# Altium PCB pcb_layout.PcbDoc
Units mil, origin at the board's own origin, x right, y up, seen from the top; angles counter-clockwise.
Board outline 2210.03 x 2460.03 mil, 2 copper layers (Top Layer, Bottom Layer); 17 components, 13 nets, 80 pads, 0 vias.
Unrouted connection lines stored in the file: 3.
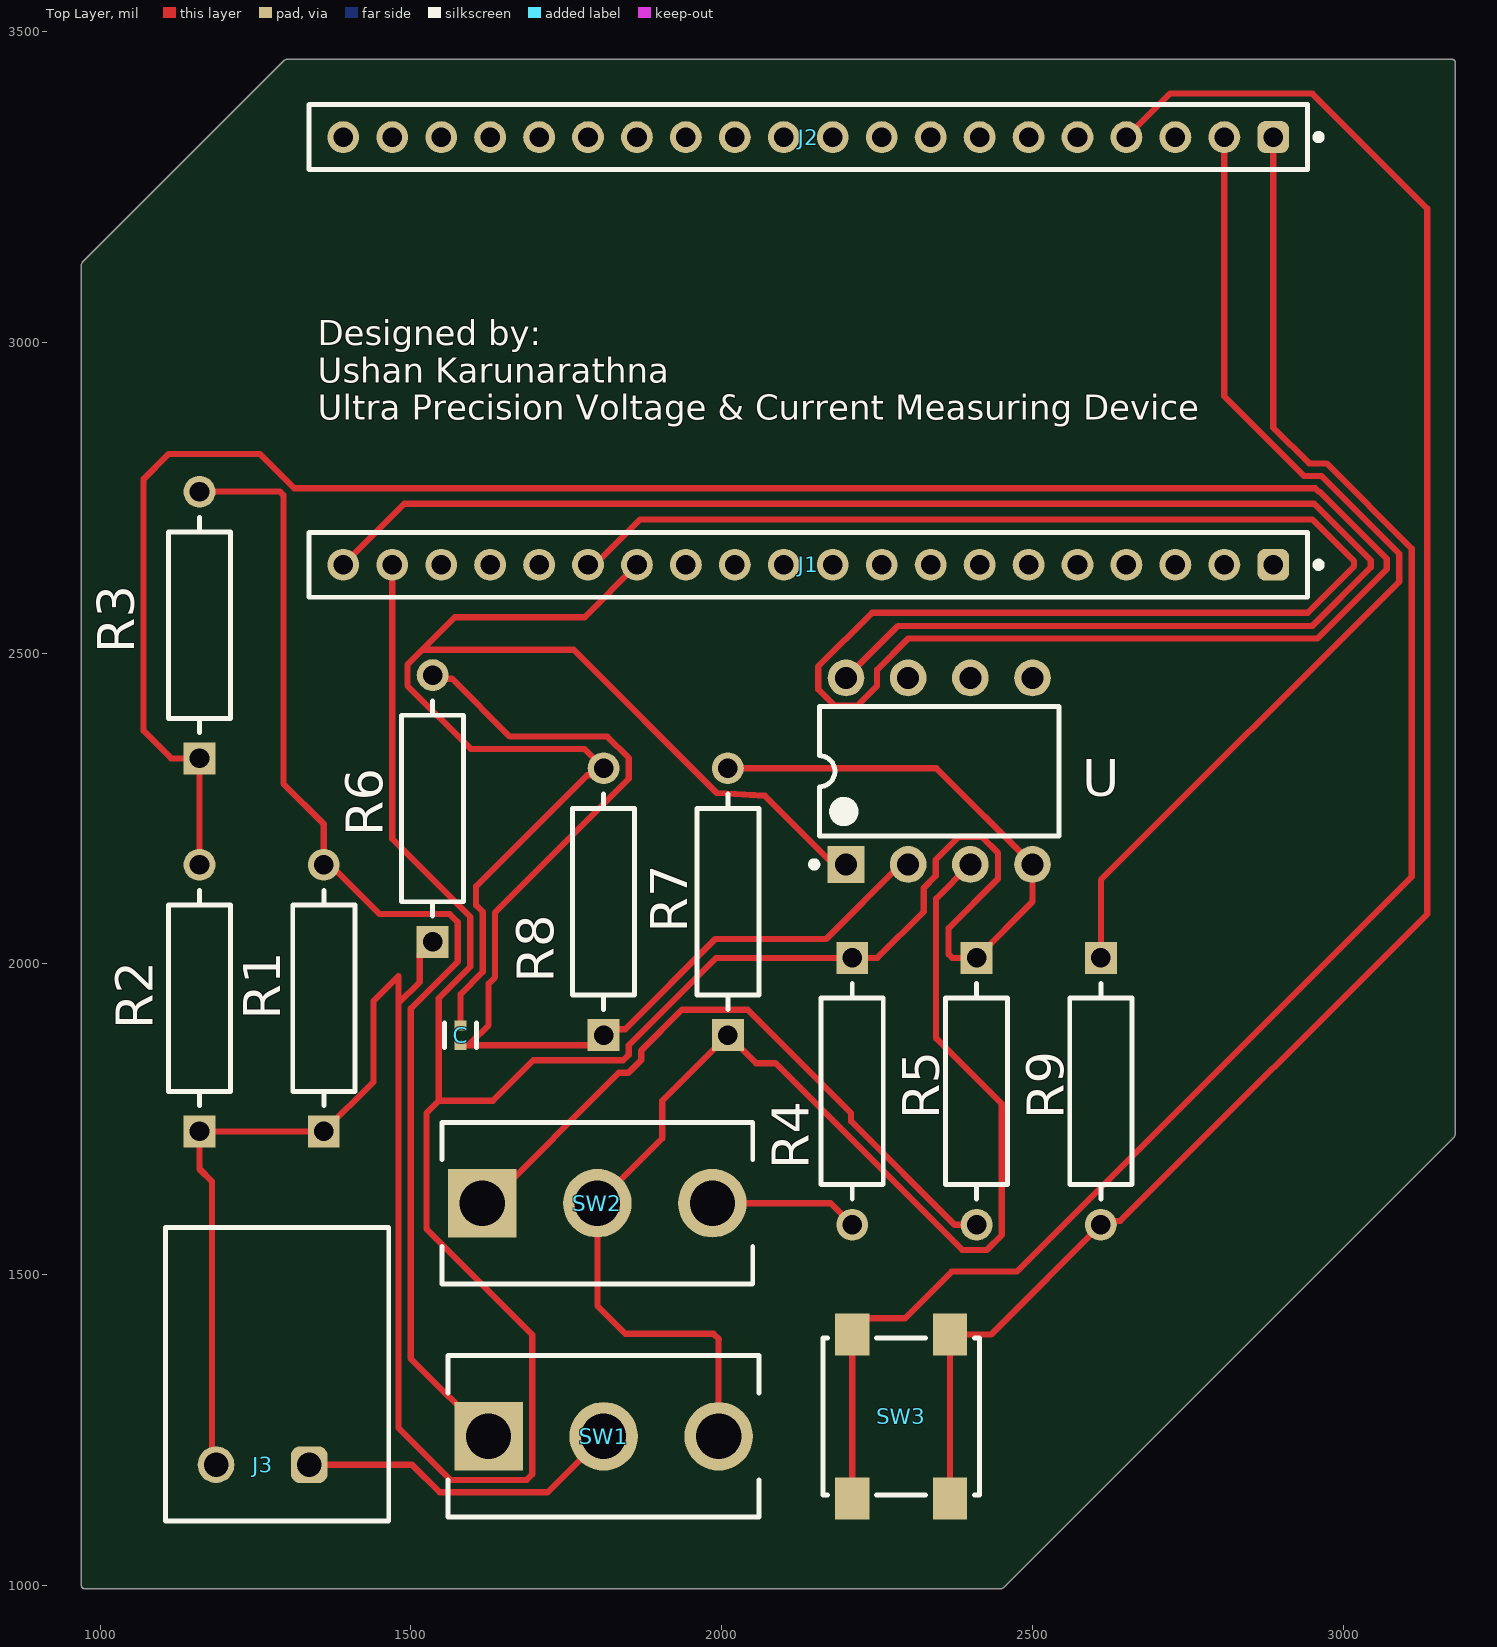
[diagram p0: Top Layer view]
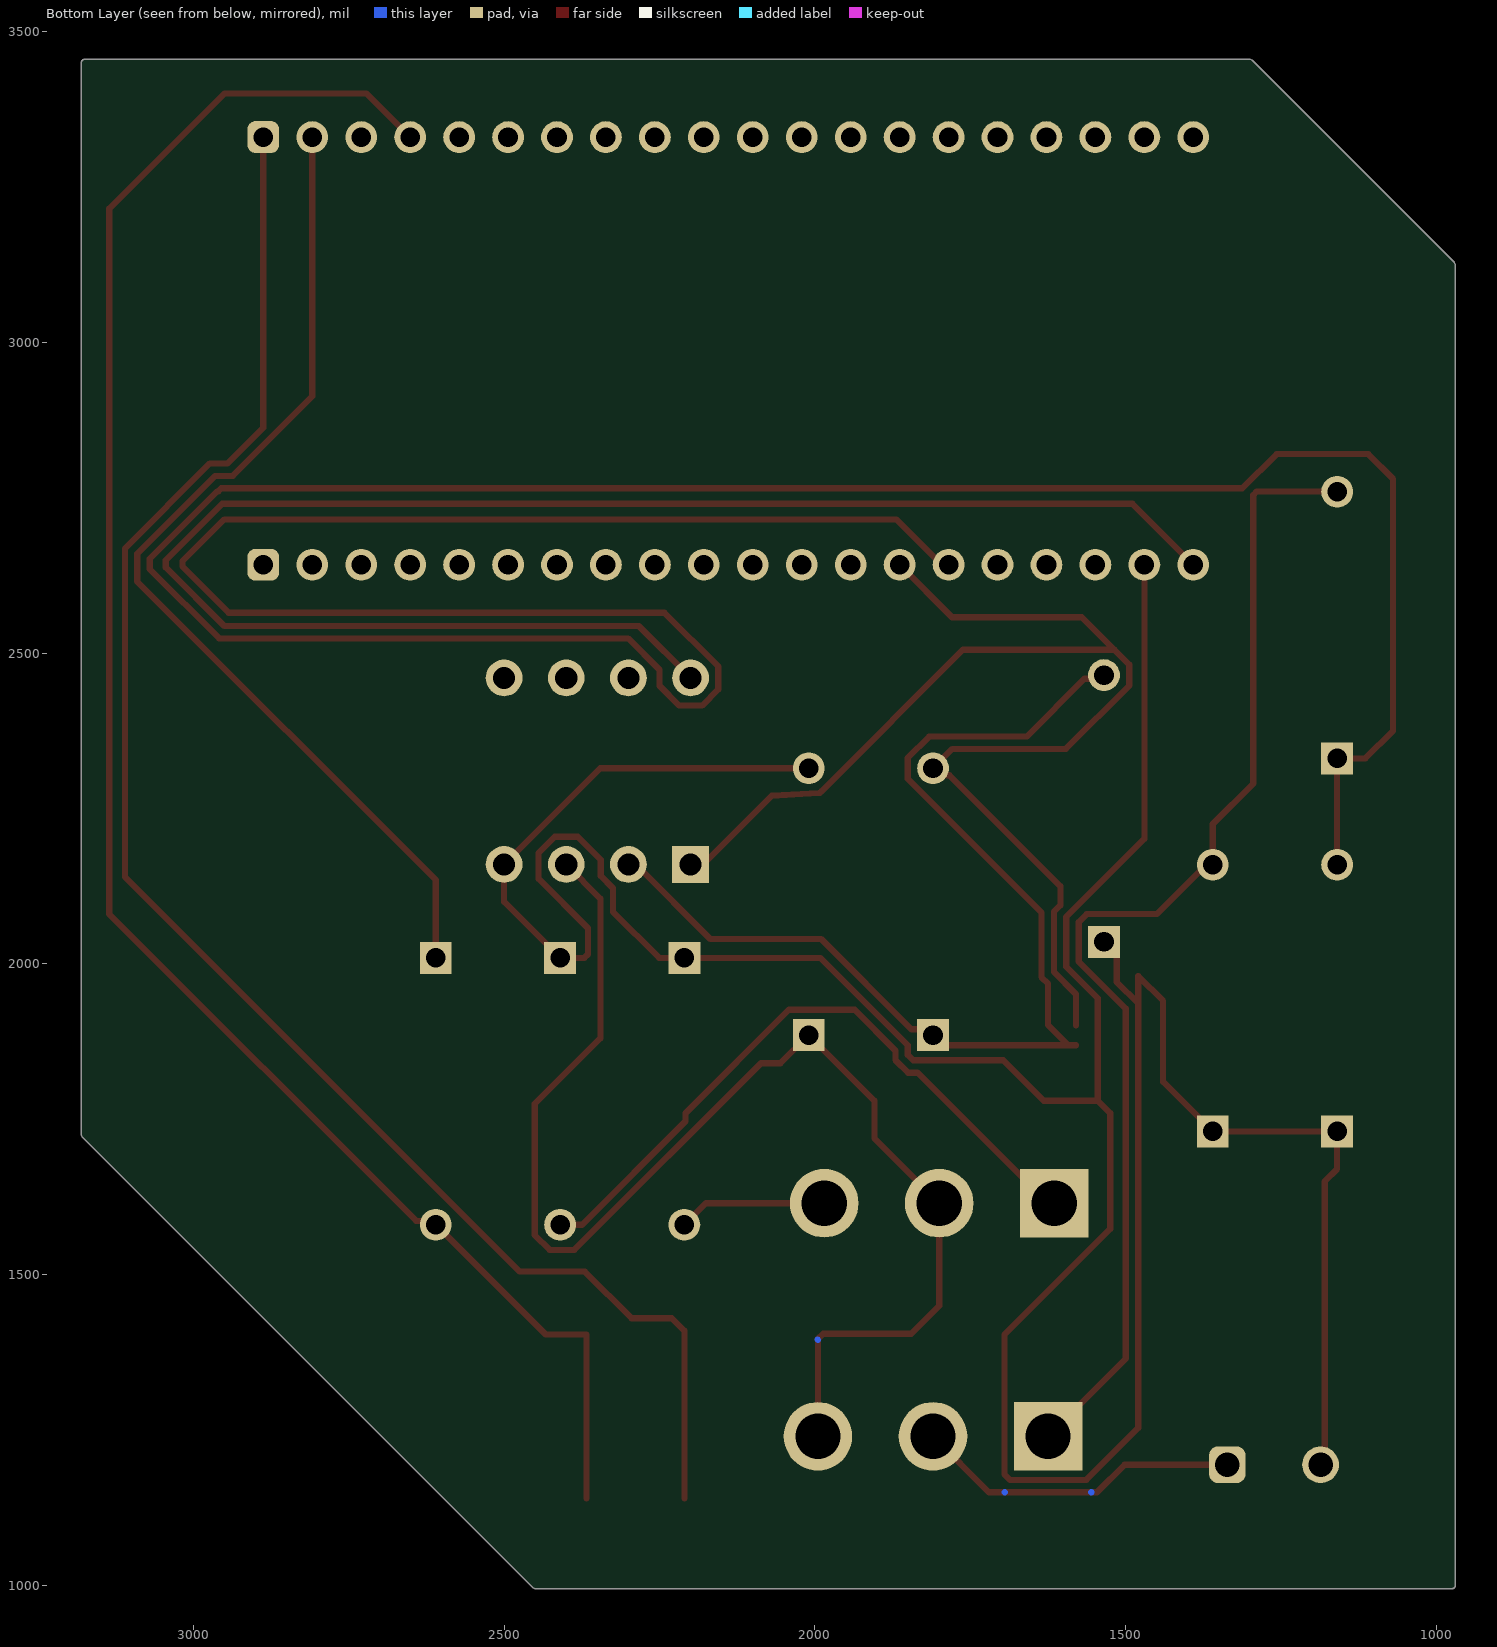
[diagram p1: Bottom Layer view, seen from below]
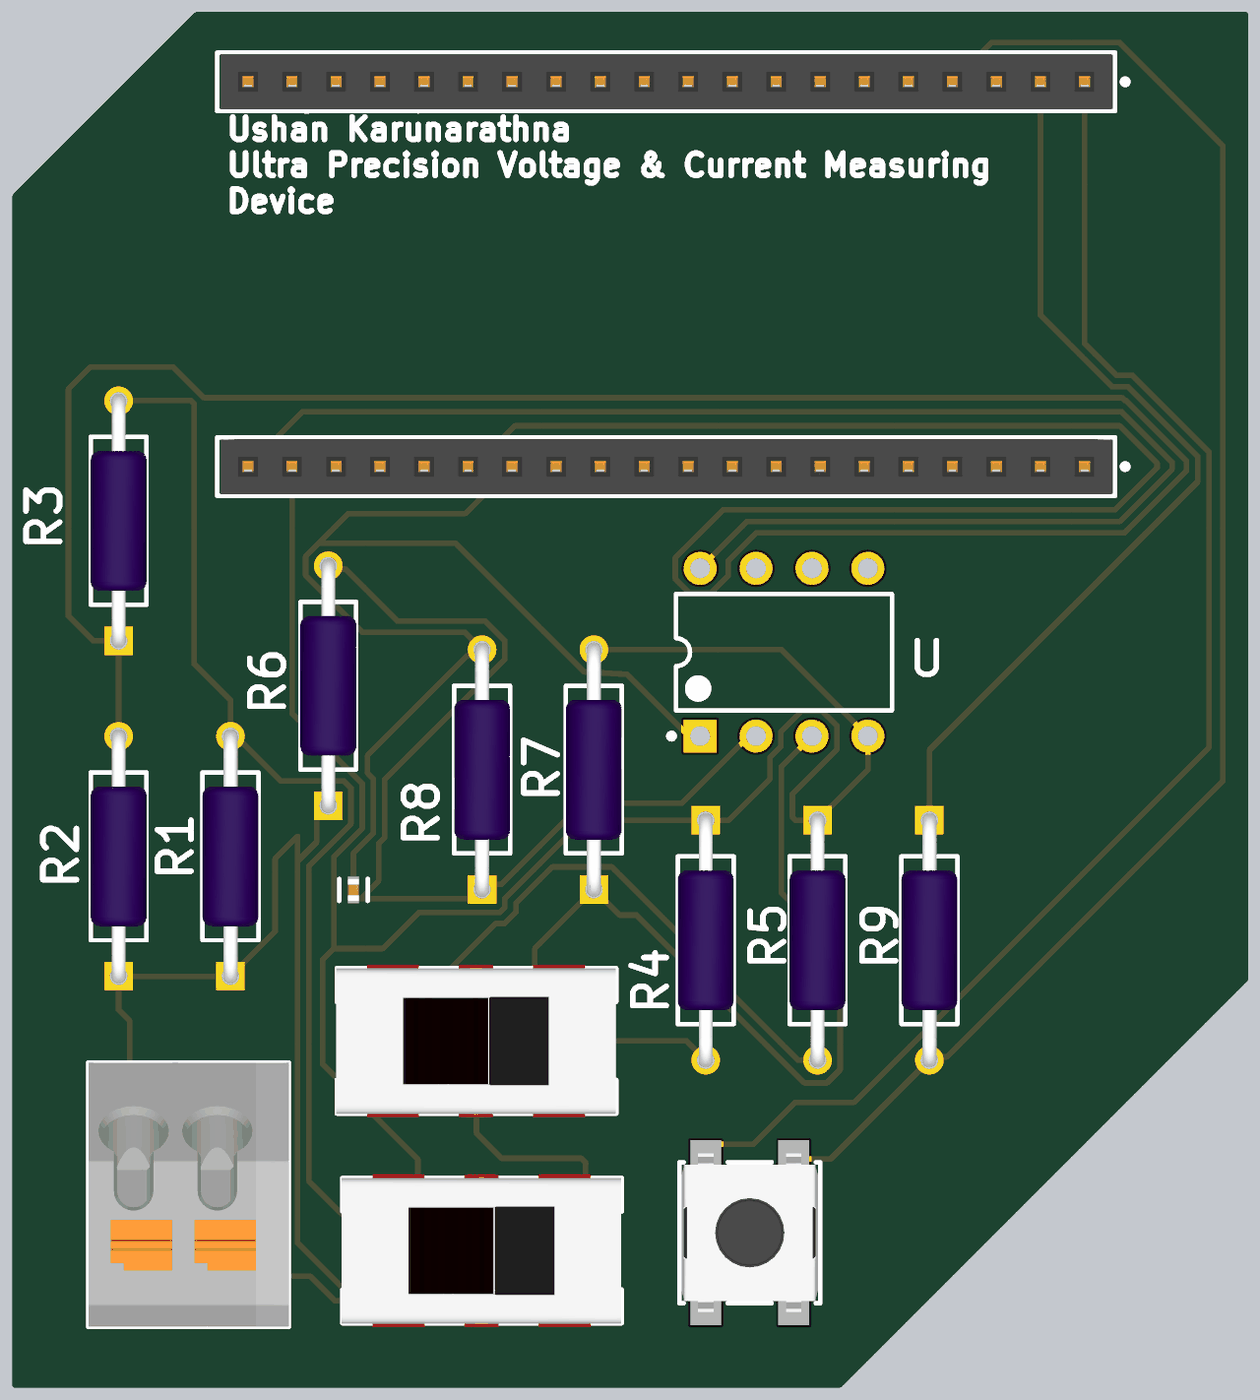
[diagram p2: 3D render of the assembled board from above, using the file's embedded part models]

## Layer stack, top to bottom
Top Solder: solder mask 0.4, Solder Resist, Dk 3.5
Top Layer: signal copper 1.4
Dielectric 1: dielectric 12.6, FR-4, Dk 4.8
Bottom Layer: signal copper 1.4
Bottom Solder: solder mask 0.4, Solder Resist, Dk 3.5

## Board outline
969.99,1000 969.99,2825 969.99,3125 971.45,3128.55 1296.45,3453.55 1300,3455.01 3175,3455.01 cw(c3175,3450) 3180.01,3450 3180.01,1725 3178.55,1721.45 2453.55,996.45 2450,994.99 975,994.99 cw(c975,1000)

## Design rules (kind name [scope] priority, off if disabled: settings)
Clearance [All] p1: gap=10 ignorepadtopadclearanceinfootprint=TRUE
PolygonConnect [All] p1: connectstyle=Relief reliefconductorwidth=10 reliefentries=4 polygonreliefangle="90 Angle" airgapwidth=10
RoutingVias [All] p1: holewidth=28 width=50 viastyle="Through Hole" minholewidth=28 minwidth=50 maxholewidth=28 maxwidth=50
SolderMaskExpansion [All] p1: expansion=4 istentingtop=FALSE
Width [All] p1: maxlimit=10 minlimit=10 preferedwidth=10
30 further rules are at their usual default settings.

## Components (designator, comment, footprint, x,y, rotation, side; value= is the part's Value field where it differs from the comment)
C "220nF" FP-GRM155-0_05-MFG 1580,1885 r90 top
J1 "Vertical Socket Header" 62002011821 2139.33,2642 r180 top
J2 "62002011821" 62002011821 2139.33,3330 r180 top
J3 "Screw Terminal Block" 691417320002S 1285,1340 r180 top
R1 "220" FP-PTF56-MFG 1360,1945 r90 top
R2 "1M" FP-PTF56-MFG 1160,1945 r90 top
R3 "4.7M" FP-PTF56-MFG 1160,2545 r90 top
R4 "33" FP-PTF56-MFG 2210,1795 r270 top
R5 "0.22" FP-PTF56-MFG 2410,1795 r270 top
R6 "1.2k" FP-PTF56-MFG 1535,2250 r90 top
R7 "100k" FP-PTF56-MFG 2010,2100 r90 top
R8 "100k" FP-PTF56-MFG 1810,2100 r90 top
R9 "100k" FP-PTF56-MFG 2610,1795 r270 top
SW1 "Miniature Slide Switch" FP-1101M2S3CGE2-MFG 1810.04,1240 r90 top
SW2 "Miniature Slide Switch" FP-1101M2S3CGE2-MFG 1800.04,1615 r90 top
SW3 "Push Button" 430473035826 2288.74,1271.89 r90 top
U "MCP6002-I/P" PDIP300-P8 2350,2310 r90 top (schematic designator U2)

## Footprints (in the part's own frame and the unit in brackets; to place one, negate y for a bottom-side part, rotate by r counter-clockwise, add the part's x,y. Pads: shape width x height; smd on the part's side, far side on the other; paste and mask are expansions set on the pad)
62002011821 [mm] "Socket Header, Pitch 2.00 mm, THT, Vertical, single row, 20p"
  rrect50% 1.3x1.3 hole 0.8: 1(-19,0)
  round 1.3 hole 0.8: 2(-17,0) 3(-15,0) 4(-13,0) 5(-11,0) 6(-9,0) 7(-7,0) 8(-5,0) 9(-3,0) 10(-1,0) 11(1,0) 12(3,0) 13(5,0) 14(7,0) 15(9,0) 16(11,0) 17(13,0) 18(15,0) 19(17,0) 20(19,0)
  silkscreen extent -20.98,-1.33 20.4,1.33, body extent -20.25,-1.25 20.25,1.25, height 4.35
430473035826 [mm] "SMD Tact Switch, body 6x6mm"
  rect 1.7x1.4 smd: A1(-3.35,2) A2(3.35,2) B1(-3.35,-2) B2(3.35,-2)
  silkscreen extent -3.2,-3.2 3.2,3.2, body extent -3.6,-3.1 3.6,3.1, height 3.5
691417320002S [mm] "Serie 4713S-3.81mm 45¡ã Cable Entry Screwless, 2 pins"
  rrect50% 1.5x1.5 hole 1: 1(-1.31,3.7)
  round 1.5 hole 1: 2(2.5,3.7)
  silkscreen extent -4.56,-6 4.56,6, body extent -4.56,-6 4.54,6, height 13.28
FP-1101M2S3CGE2-MFG [mm]
  rect 2.8x2.8 hole 1.85 paste-2539.97 mask+0: 1(0,4.7)
  round 2.8 hole 1.85 paste-2539.97 mask+0: 2(0,0) 3(0,-4.7)
  silkscreen extent -3.3,-6.35 3.3,6.35, body extent -3.4,-6.45 3.4,6.45, height 0.25
FP-GRM155-0_05-MFG [mm]
  rect 0.4x0.5 smd paste+0 mask+0: 1(-0.4,0) 2(0.4,0)
  silkscreen extent -0.5,-0.65 0.5,0.65, body extent -0.7,-0.38 0.7,0.38, height 0.25
FP-PTF56-MFG [mm]
  rect 1.3x1.3 hole 0.8 paste-2539.97 mask+0: 1(-5.45,0)
  round 1.3 hole 0.8 paste-2539.97 mask+0: 2(5.45,0)
  silkscreen extent -4.4,-1.27 4.4,1.27, body extent -6.2,-1.37 6.2,1.37, height 0.25
PDIP300-P8 [mm] "8-Pin Plastic Dual In-Line Package (PDIP)"
  rect 1.5x1.5 hole 0.9: 1(-3.81,3.81)
  round 1.5 hole 0.9: 2(-3.81,1.27) 3(-3.81,-1.27) 4(-3.81,-3.81) 5(3.81,-3.81) 6(3.81,-1.27) 7(3.81,1.27) 8(3.81,3.81)
  silkscreen extent -3.93,-4.9 2.65,5.23, body extent -3.55,-4.9 3.55,4.9, height 4.32

## Part data
C: library part CMP-06035-063955-1, "Multilayer Ceramic Capacitor 0.22uF 10% 63V X5R 0402 Paper T/R"
J1 J2: library part CMP-1502-01214-3, Contact Resistance=20mΩ, Current Rating=2A, Operating Supply Voltage=250V, Gender=Female, Lead Pitch=2mm, NexarPartId=65162172, Number of Pins=20, Orientation=Vertical
J3: library part CMP-1502-02970-2, NexarPartId=105951391
R1: library part CMP-00030-29520625-1, "Res Metal Film 220 Ohm 1% ± 5ppm/°C 1/8W Axial Leaded T/R", Case/Package=Axial, Max Operating Temperature=150°C, Min Operating Temperature=-55°C, Power Rating=125mW, Resistance=250kΩ, Temperature Coefficient=5ppm/°C, Tolerance=1%, Voltage Rating=300V, Composition="Metal Film", Height=2.54mm, Lead Diameter=640µm, Length=6.35mm, Mount="Through Hole", NexarPartId=29520625, RoHS=Compliant, Termination=Axial, Weight=350.003213mg
R2: library part CMP-00030-29520625-1, "Res Metal Film 1MOhm 1% ± 5ppm/°C 1/8W Axial Leaded T/R", Case/Package=Axial, Max Operating Temperature=150°C, Min Operating Temperature=-55°C, Power Rating=125mW, Resistance=250kΩ, Temperature Coefficient=5ppm/°C, Tolerance=1%, Voltage Rating=300V, Composition="Metal Film", Height=2.54mm, Lead Diameter=640µm, Length=6.35mm, Mount="Through Hole", NexarPartId=29520625, RoHS=Compliant, Termination=Axial, Weight=350.003213mg
R3: library part CMP-00030-29520625-1, "Res Metal Film 4.7MOhm 1% ± 5ppm/°C 1/8W Axial Leaded T/R", Case/Package=Axial, Max Operating Temperature=150°C, Min Operating Temperature=-55°C, Power Rating=125mW, Resistance=250kΩ, Temperature Coefficient=5ppm/°C, Tolerance=1%, Voltage Rating=300V, Composition="Metal Film", Height=2.54mm, Lead Diameter=640µm, Length=6.35mm, Mount="Through Hole", NexarPartId=29520625, RoHS=Compliant, Termination=Axial, Weight=350.003213mg
R4: library part CMP-00030-29520625-1, "Res Metal Film 33Ohm 1% ± 5ppm/°C 1/8W Axial Leaded T/R", Case/Package=Axial, Max Operating Temperature=150°C, Min Operating Temperature=-55°C, Power Rating=125mW, Resistance=250kΩ, Temperature Coefficient=5ppm/°C, Tolerance=1%, Voltage Rating=300V, Composition="Metal Film", Height=2.54mm, Lead Diameter=640µm, Length=6.35mm, Mount="Through Hole", NexarPartId=29520625, RoHS=Compliant, Termination=Axial, Weight=350.003213mg
R5: library part CMP-00030-29520625-1, "Res Metal Film 0.22Ohm 1% ± 5ppm/°C 1/8W Axial Leaded T/R", Case/Package=Axial, Max Operating Temperature=150°C, Min Operating Temperature=-55°C, Power Rating=125mW, Resistance=250kΩ, Temperature Coefficient=5ppm/°C, Tolerance=1%, Voltage Rating=300V, Composition="Metal Film", Height=2.54mm, Lead Diameter=640µm, Length=6.35mm, Mount="Through Hole", NexarPartId=29520625, RoHS=Compliant, Termination=Axial, Weight=350.003213mg
R6: library part CMP-00030-29520625-1, "Res Metal Film 1.2kOhm 1% ± 5ppm/°C 1/8W Axial Leaded T/R", Case/Package=Axial, Max Operating Temperature=150°C, Min Operating Temperature=-55°C, Power Rating=125mW, Resistance=250kΩ, Temperature Coefficient=5ppm/°C, Tolerance=1%, Voltage Rating=300V, Composition="Metal Film", Height=2.54mm, Lead Diameter=640µm, Length=6.35mm, Mount="Through Hole", NexarPartId=29520625, RoHS=Compliant, Termination=Axial, Weight=350.003213mg
R7 R8: library part CMP-00030-29520625-1, "Res Metal Film 100kOhm 1% ± 5ppm/°C 1/8W Axial Leaded T/R", Case/Package=Axial, Max Operating Temperature=150°C, Min Operating Temperature=-55°C, Power Rating=125mW, Resistance=250kΩ, Temperature Coefficient=5ppm/°C, Tolerance=1%, Voltage Rating=300V, Composition="Metal Film", Height=2.54mm, Lead Diameter=640µm, Length=6.35mm, Mount="Through Hole", NexarPartId=29520625, RoHS=Compliant, Termination=Axial, Weight=350.003213mg
R9: library part CMP-00030-29520625-1, "PTF56250K00FZEB Res Metal Film 250kOhm 1% ± 5ppm/°C 1/8W Axial Leaded T/R", Case/Package=Axial, Max Operating Temperature=150°C, Min Operating Temperature=-55°C, Power Rating=125mW, Resistance=250kΩ, Temperature Coefficient=5ppm/°C, Tolerance=1%, Voltage Rating=300V, Composition="Metal Film", Height=2.54mm, Lead Diameter=640µm, Length=6.35mm, Mount="Through Hole", NexarPartId=29520625, RoHS=Compliant, Termination=Axial, Weight=350.003213mg
SW1 SW2: library part CMP-10038-000004-1, "SWITCH SLIDE SPDT 6A 120V", Contact Current Rating=6A, Contact Resistance=10mΩ, Manufacturer="C&K Components", Manufacturer Part Number=1101M2S3CGE2, Temperature="-30°C to +65°C", Temperature Range High=+65°C, Temperature Range Low=-30°C, Voltage Rating Ac=120V, Voltage Rating Dc=28V, Automotive=No, Category=Switch, ComponentLink2Description=Datasheet, ComponentLink2URL=https://www.ckswitches.com/media/1429/1000.pdf, Device Class L1=Electromechanical, Device Class L2=Switches, Device Class L3="Slide Switches", Digikey Description="SWITCH SLIDE SPDT 6A 120V", Electromechanical Life=40000Cycles, Height=13.34mm, Lead Free=Yes, Mount="Through Hole", Mouser Description="Switch Slide ON None ON SPDT Top Slide 6A 250VAC 28VDC 0.4VA PC Pins Thru-Hole Bulk", Octopart=https://octopart.com/1101m2s3cge2-c%26k+components-2817222, Package=1101M2S3CGE2, RoHS=TRUE, Throw Configuration=SPDT
SW3: library part CMP-1455-00006-3, "Switch Tactile Spst-no 0.05A 12V", Current Rating=50mA, Insulation Resistance=100MΩ, Max Operating Temperature=85°C, Min Operating Temperature=-40°C, Voltage Rating=12V, Actuator Material="Liquid Crystal Polymer, Polymer", Contact Plating=Silver, Height=3.5mm, Illumination Type=Non-Illuminated, Mechanical Life=500kcycles, Mount="Surface Mount", Packaging="Tape and Reel", RoHS=Compliant, Switch Function=Off-Mom, Switch Travel=250µm, Throw Configuration=SPST
U: library part CMP-0187-00119-3, "None", Case/Package=PDIP, Input Bias Current=1pA, Input Offset Voltage (Vos)=4.5mV, Max Frequency=1kHz, Max Input Voltage=6V, Max Operating Temperature=85°C, Min Input Voltage=1.8V, Min Operating Temperature=-40°C, Nominal Supply Current=100uA, Operating Supply Voltage=5.5V, Output Current=23mA, Package Quantity=60, Power Supply Rejection Ratio (PSRR)=86dB, Voltage Gain=112dB, Amplifier Type="GENERAL PURPOSE", Bandwidth=1MHz, Common Mode Rejection Ratio=60dB, Gain Bandwidth Product=1MHz, Height=0.195inch, Input Offset Voltage-Max=4.5mV, Lead Free="Lead Free", Length=0.4inch, Max Supply Voltage=6V, Min Supply Voltage=1.8V, Mount="Through Hole", Number of Amplifiers=2, Number of Channels=2, Number of Circuits=2, Number of Elements=2, Number of Pins=8, Operating Supply Current=100uA, Output Current per Channel=23mA, Packaging=Rail/Tube, Radiation Hardening=No, REACH SVHC="No SVHC", RoHS Compliant=Yes, Slew Rate=0.6V/µs, Slew Rate-Nom=0.6V/µs, Supply Current=100uA, Technology=CMOS, Unity Gain Bandwidth Product=1MHz, Width=0.28inch

## Nets (pads, with @x,y where several pads share a name; then routed paths per layer and width w, separated by ;. In a path a pad name is that pad's centre, name@x,y a point inside that pad or via, vN(x,y) a via of type N, cw(c..) or ccw(c..) an arc to the next point about the centre after c; other vN are vias at no path point)
NetC_1: C.1 R6.2 R8.1 U.2 | length 1776.1
  Top Layer w10: R6.2 1540.99,2458.58 1566.42,2458.58 1659.31,2365.69 1816.28,2365.69 1850.59,2331.38 1850.59,2297.75 1635.59,2082.75 1635.59,1978.78 1625,1968.19 1625,1901.53 1595.6,1872.13 ; C.1 1595.6,1869.25 1793.82,1869.25 1819.3,1894.73 1844.73,1894.73 1990,2040 2168.04,2040 2288.04,2160 U.2
NetC_2: C.2 J1.14 R8.2 U.1 | length 2188.7
  Top Layer w10: C.2 1580,1951.47 1615.59,1987.06 1615.59,2083.81 1605,2094.4 1605,2125 1783.58,2303.58 1787.87,2303.58 1798.86,2314.57 R8.2 1778.88,2345.69 1596.47,2345.69 1494.41,2447.75 1494.41,2481.38 1518.19,2505.16 ; J1.14 1779.49,2557.75 1570.78,2557.75 1518.19,2505.16 ; U.1 2175.47,2164.53 2069.54,2270.46 2007.65,2274.04 cw(c2010,2314.57) 2007.5,2274.05 1992.16,2275 1989.23,2277.93 1762.01,2505.16 1518.19,2505.16
NetJ1_15: J1.15 R2.2 R3.1 | length 6083
  Top Layer w10: R2.2 R3.1 1114.57,2330.43 1070,2375 1070,2780 1110,2820 1257.43,2820 1312.43,2765 2955,2765 2960,2760 2961.57,2760 3070,2651.57 3070,2635 2958.54,2523.54 2300.57,2523.54 2250,2472.97 2250,2447.03 2218.44,2415.47 2181.56,2415.47 2155.47,2441.56 2155.47,2478.44 2242.03,2565 2943.12,2565 3017.42,2639.3 3017.42,2647.58 2950,2715 1869.14,2715 1796.14,2642 J1.15
NetJ1_19: J1.19 J3.2 R1.1 R2.1 R4.1 R5.1 R6.1 R7.2 U.4 | length 5882
  Top Layer w10: J3.2@1180,1200.91 1180,1650 1160,1670 R2.1 R1.1 1440,1810.43 1440,1940.43 1480,1980.43 1480,1936.32 ; J1.19 1470.04,2201.07 1595.59,2075.52 1595.59,1995.35 1544.88,1944.64 1544.88,1779.88 ; R6.1 1514.41,2014.84 1514.41,1970.73 1480,1936.32 ; R7.2 2345.43,2314.57 U.4 2500,2099.57 R5.1 2370.86,2009.57 2365,2015.42 2365,2057.17 2444.53,2136.7 2444.53,2178.44 2418.44,2204.53 2381.56,2204.53 2344.53,2167.5 2344.53,2141.56 2325,2122.03 2325,2083.98 2250.59,2009.57 R4.1 1991.24,2009.57 1850.59,1868.91 1850.59,1853.63 1841.8,1844.84 1697.02,1844.84 1632.05,1779.88 1544.88,1779.88 ; 1480,1936.32 1480,1253.55 1563.67,1169.88 1686.33,1169.88 1695.12,1178.67 1695.12,1403.43 1525,1573.55 1525,1760 1544.88,1779.88
  Bottom Layer w10: J3.2@1180,1200.91 J3.2
NetJ1_20: J1.20 U.8 | length 2660.2
  Top Layer w10: J1.20 1489.3,2740 2953.28,2740 3044.14,2649.14 3044.14,2637.74 2949.94,2543.54 2283.54,2543.54 U.8
NetJ2_1: J2.1 SW3.A1 SW3.A2 | length 2771
  Top Layer w10: SW3.A1 SW3.A2 2210,1409.69 2230.31,1430 2295,1430 2370,1505 2475,1505 3110,2140 3110,2668.14 2973.14,2805 2944.85,2805 2887.36,2862.49 J2.1
NetJ2_2: J2.2 R9.1 | length 1652.4
  Top Layer w10: R9.1 2610,2135 3090,2615 3090,2659.85 2964.85,2785 2936.57,2785 2808.62,2912.95 J2.2
NetJ2_4: J2.4 R9.2 SW3.B1 SW3.B2 | length 3035.9
  Top Layer w10: SW3.B1 SW3.B2 2433.35,1403.78 2615.99,1586.42 2641.42,1586.42 3135,2080 3135,3215 2950,3400 2721.14,3400 J2.4
NetJ3_1: J3.1 SW1.2 | length 529.2
  Top Layer w10: J3.1 1501.87,1194.33 1546.2,1150 1555.27,1150 ; 1555.38,1149.88 1694.62,1149.88 ; 1694.73,1150 1720.04,1150 SW1.2
  Bottom Layer w10: 1555.27,1150 1555.38,1149.88 ; 1694.62,1149.88 1694.73,1150
NetR1_2: R1.2 R3.2 SW1.1 | length 1923.3
  Top Layer w10: R3.2@1160.43,2760 1289.14,2760 1295,2754.14 1295,2290 1360,2225 R1.2 ; R1.2@1370.43,2159.57 1450,2080 1562.83,2080 1575.59,2067.24 1575.59,2003.63 1500,1928.04 1500,1365 SW1.1
  Bottom Layer w10: R3.2 R3.2@1160.43,2760 ; R1.2 R1.2@1370.43,2159.57
NetR4_2: R4.2 SW2.3 | length 229.3
  Top Layer w10: SW2.3@1995.04,1615 2175.43,1615 R4.2
NetR5_2: R5.2 SW2.1 | length 1073.5
  Top Layer w10: SW2.1@1624.96,1615 1834.8,1824.84 1850.09,1824.84 1870.59,1845.35 1870.59,1860.63 1935.98,1926.02 2041.8,1926.02 2208.19,1759.64 2208.19,1746.81 2374.57,1580.43 R5.2
NetR7_1: R7.1 SW1.3 SW2.2 U.3 | length 2153.3
  Top Layer w10: SW1.3 1995.08,1395.08 ; 1995.86,1395.86 1986.72,1405 1845,1405 1800.04,1449.96 SW2.2 1904.31,1719.27 1904.31,1779.75 R7.1 2055.43,1840 2086.72,1840 2386.87,1539.84 2426.81,1539.84 2450.59,1563.62 2450.59,1774.88 2345,1880.47 2345,2105 U.3
  Bottom Layer w10: 1995.08,1395.08 1995.86,1395.86
pads on no net: J1.1 J1.2 J1.3 J1.4 J1.5 J1.6 J1.7 J1.8 J1.9 J1.10 J1.11 J1.12 J1.13 J1.16 J1.17 J1.18 J2.3 J2.5 J2.6 J2.7 J2.8 J2.9 J2.10 J2.11 J2.12 J2.13 J2.14 J2.15 J2.16 J2.17 J2.18 J2.19 J2.20 U.5 U.6 U.7

## Silkscreen, mask and mechanical layers (free items; w line width, h text height)
Top Overlay:
  text "Designed by: / Ushan Karunarathna / Ultra Precision Voltage & Current Measuring Device" at 1350,2875 h40